# Altium PCB PCB1.PcbDoc
Units mm, origin at the board's own origin, x right, y up, seen from the top; angles counter-clockwise.
Board outline 146.69 x 93.34 mm, 2 copper layers (Top Layer, Bottom Layer); 89 components, 58 nets, 272 pads, 10 vias.
Unrouted connection lines stored in the file: 94.
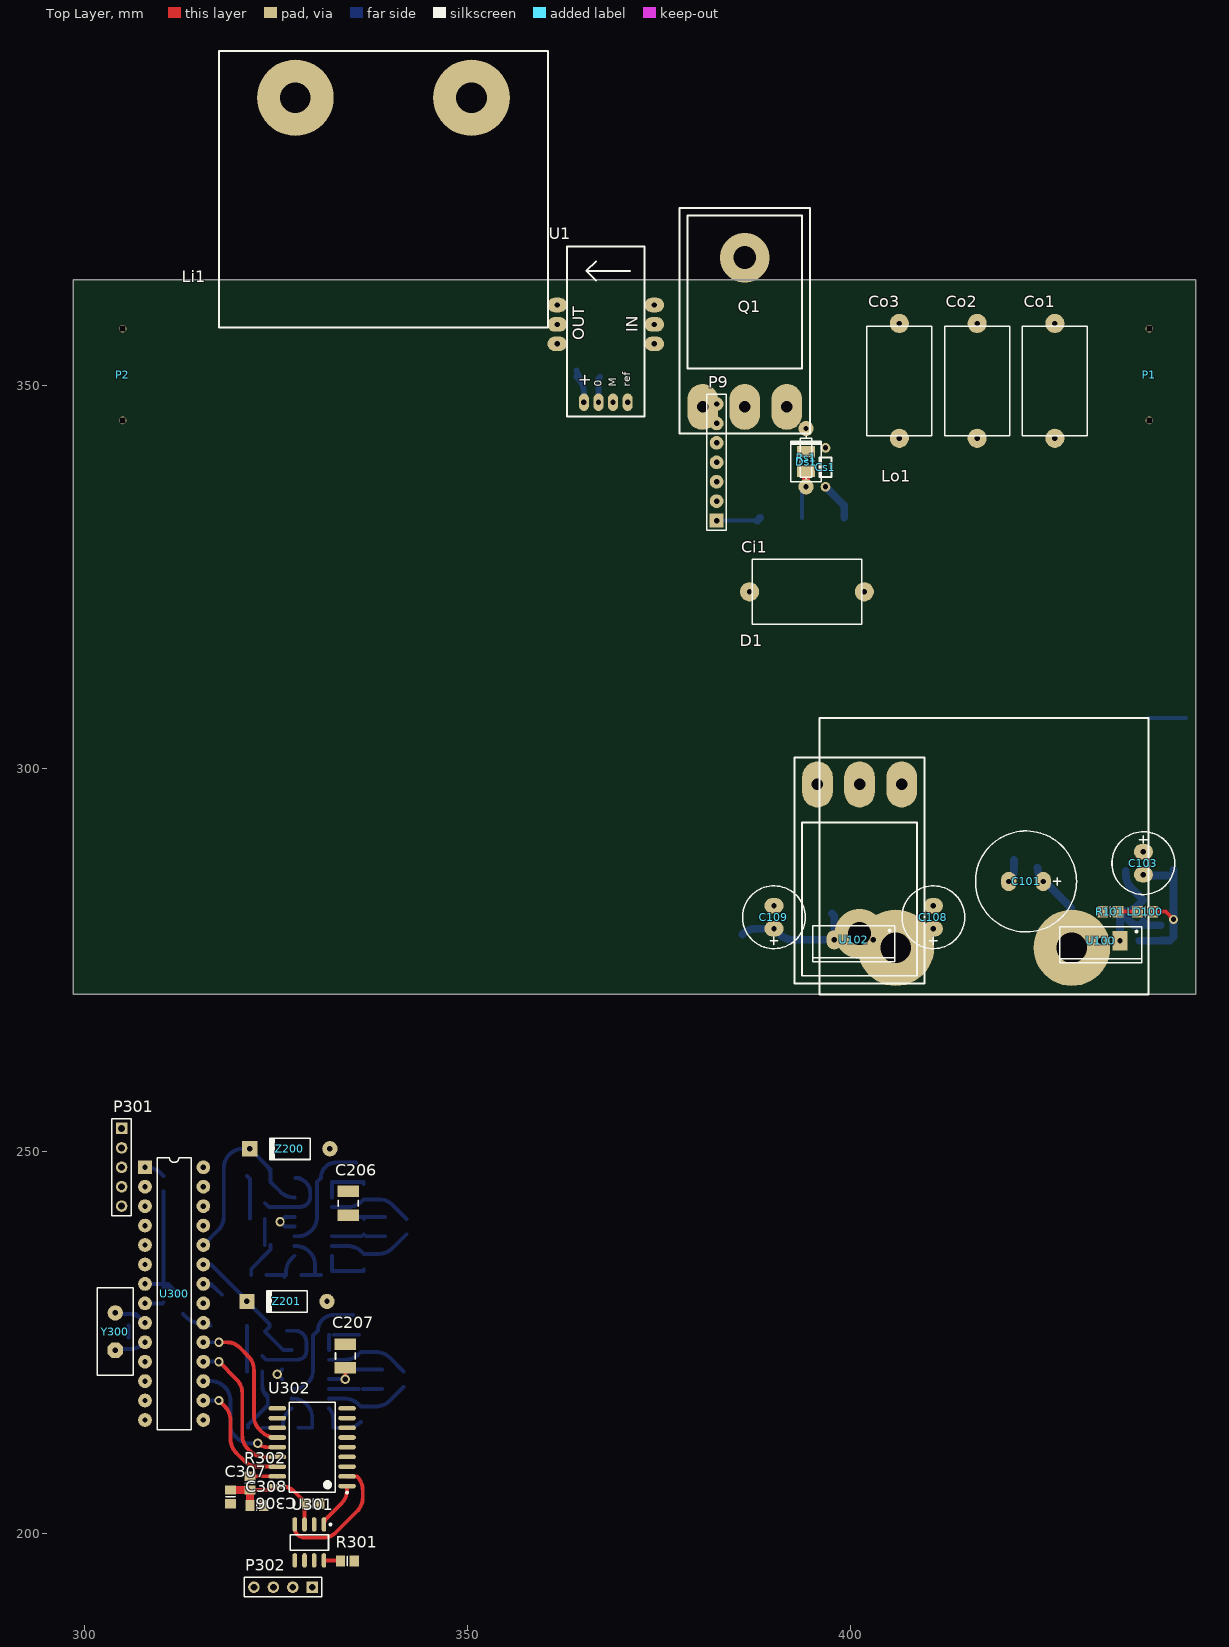
[diagram p0: Top Layer view]
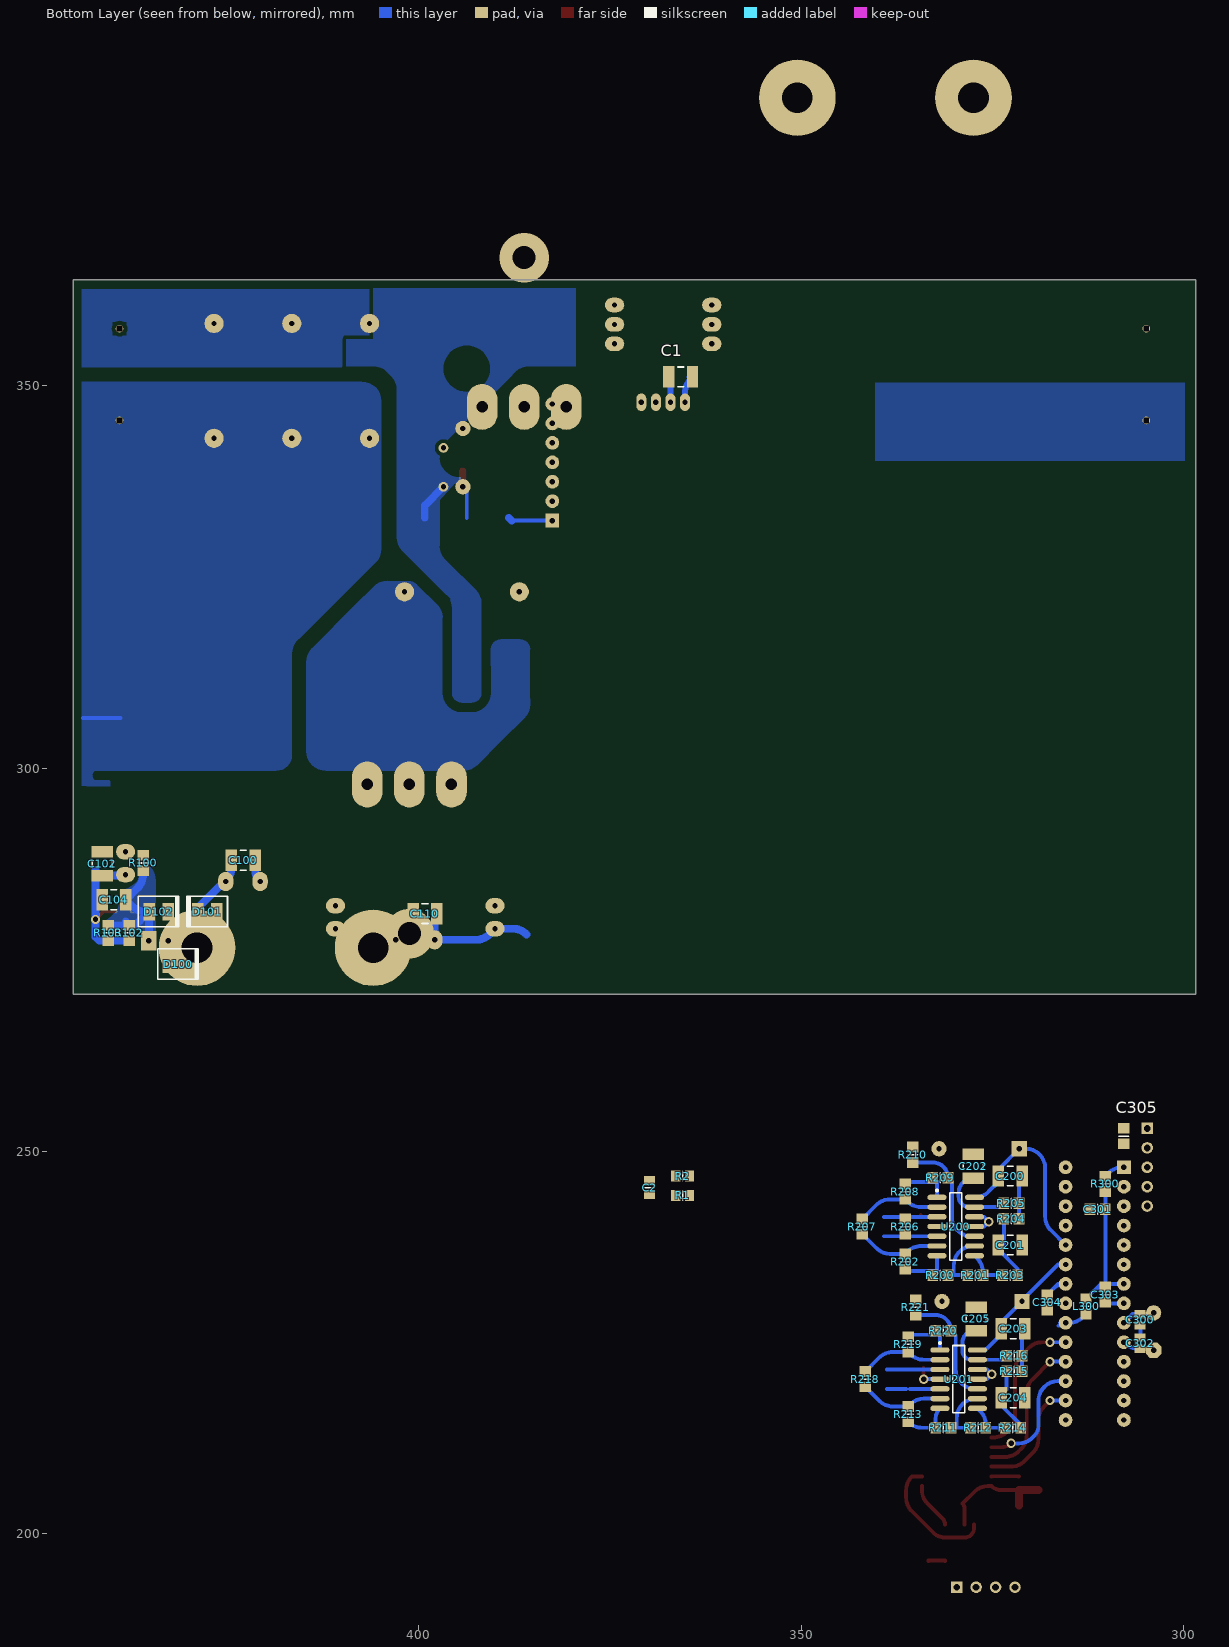
[diagram p1: Bottom Layer view, seen from below]

## Layer stack, top to bottom
Top Solder: solder mask 0.0102, Solder Resist, Dk 3.5
Top Layer: signal copper 0.0356
Dielectric1: dielectric 0.32, FR-4, Dk 4.8
Bottom Layer: signal copper 0.0356
Bottom Solder: solder mask 0.0102, Solder Resist, Dk 3.5

## Board outline
298.45,363.855 445.135,363.855 445.135,270.51 298.45,270.51

## Design rules (kind name [scope] priority, off if disabled: settings)
Clearance [All] p1: gap=0.508
PolygonConnect [All] p1: connectstyle=Direct reliefconductorwidth=0.254 reliefentries=4 polygonreliefangle="45 Angle" airgapwidth=0.254
RoomDefinition voltageSupplies [InComponentClass('voltageSupplies')] p1: confinementstyle=ConfineIn formatcopy=TRUE lockcomponents=FALSE outline 0,0 50.8,0 50.8,25.4 0,25.4
RoomDefinition uController [InComponentClass('uController')] p2: confinementstyle=ConfineIn formatcopy=TRUE lockcomponents=FALSE outline 0,0 50.8,0 50.8,25.4 0,25.4
RoomDefinition Signals [InComponentClass('Signals')] p3: confinementstyle=ConfineIn formatcopy=TRUE lockcomponents=FALSE outline 0,0 50.8,0 50.8,25.4 0,25.4
RoomDefinition cuk [InComponentClass('cuk')] p4: confinementstyle=ConfineIn formatcopy=TRUE lockcomponents=FALSE outline 0,0 50.8,0 50.8,25.4 0,25.4
RoutingVias [All] p1: holewidth=0.711 width=1.27 viastyle="Through Hole" minholewidth=0.711 minwidth=1.27 maxholewidth=0.711 maxwidth=1.27
SolderMaskExpansion [All] p1: expansion=0.102
Width [All] p1: maxlimit=2.54 minlimit=0.254 preferedwidth=0.508 minimp=50.000000 maximp=50.000000 favimp=50.000000
30 further rules are at their usual default settings.

## Classes and differential pairs
component class cuk: C1 C2 Ci1 Co1 Co2 Co3 Cs1 D1 Ds1 Li1 Lo1 P1 P2 P9 Q1 R1 R2 Rs1 U1
component class Signals: C200 C201 C202 C203 C204 C205 C206 C207 R200 R201 R202 R203 R204 R205 R206 R207 R208 R209 R210 R211 R212 R213 R214 R215 R216 R218 R219 R220 R221 U200 U201 Z200 Z201
component class uController: C300 C301 C302 C303 C304 C305 C306 C307 C308 L300 P301 P302 R300 R301 R302 U300 U301 U302 Y300
component class voltageSupplies: C100 C101 C102 C103 C104 C108 C109 C110 D100 D101 D102 LD100 R100 R101 R102 R103 U100 U102

## Components (designator, comment, footprint, x,y, rotation, side; value= is the part's Value field where it differs from the comment)
C1 "Cer" C1210_M 365.76,351.155 r0 bottom
C2 "Cap" 6-0805_N 369.824,245.237 r270 bottom
C100 "Cap" C1210_M 422.91,288.036 r0 bottom
C101 "Cap" CAPELTR-RAD6.6-DPP4.5 420.696,285.242 r0 top
C102 "Cap" C1210_M 441.325,287.555 r90 bottom
C103 "Cap" CAPELTR-RAD4.1-DPP3.0 438.277,286.131 r90 top
C104 "Cap" C1210_M 439.801,282.829 r180 bottom
C108 "Cap" CAPELTR-RAD4.1-DPP3.0 410.845,282.067 r270 top
C109 "Cap" CAPELTR-RAD4.1-DPP3.0 390.017,282.067 r270 top
C110 "Cap" C1210_M 399.161,281.051 r180 bottom
C200 "Cer" C1210_M 322.707,246.761 r0 bottom
C201 "Cer" C1210_M 322.707,237.744 r0 bottom
C202 "Cer" C1210_M 327.533,248.031 r270 bottom
C203 "Cer" C1210_M 322.326,226.822 r0 bottom
C204 "Cer" C1210_M 322.326,217.805 r0 bottom
C205 "Cer" C1210_M 327.152,228.092 r270 bottom
C206 "Cer" C1210_M 334.391,243.205 r270 top
C207 "Cer" C1210_M 334.035,223.241 r270 top
C300 "Cap" C0805 305.74,227.977 r90 bottom
C301 "Cap" 6-0805_M 311.277,242.443 r0 bottom
C302 "Cap" C0805 305.74,224.917 r270 bottom
C303 "Cap" 6-0805_M 310.261,231.267 r270 bottom
C304 "Cap" 6-0805_M 317.881,230.251 r90 bottom
C305 "Cap" 6-0805_M 307.848,251.984 r90 bottom
C306 "Cap" 6-0805_N 329.826,203.966 r180 top
C307 "Cap" 6-0805_N 319.024,204.84 r90 top
C308 "Cap" 6-0805_N 322.464,203.708 r180 top
Ci1 "Cap" CAP4U7 386.828,323.088 r0 top
Co1 "Cap" CAP4U7 426.72,358.14 r270 top
Co2 "Cap" cap4u7 416.56,358.14 r270 top
Co3 "Cap" cap4u7 406.4,358.14 r270 top
Cs1 "Cap" 100NF 396.748,336.804 r90 top
D1 "60APU06" TO-247AC_HORIZONTAL 401.2,278.42 r180 top locked
D100 "BYD77" SOD87 431.419,274.447 r180 bottom
D101 "Diode 1N4002" SOD87 427.609,281.305 r0 bottom
D102 "1N4002" SOD87 433.959,281.305 r180 bottom
Ds1 "BYD77" SOD87 394.208,340.106 r90 top
L300 "Ferrite Bead" 6-0805_M 312.801,229.743 r90 bottom
LD100 "RED" 6-0805_M 438.515,281.305 r0 top
Li1 "Inductor" ? 317.5,357.632 r0 top
Lo1 "Inductor" ? 438.94,306.578 r180 top
P1 "Battery Connection" "POWER CONNECTION" 439.067,351.472 r270 top
P2 "Panel Connection" "POWER CONNECTION" 304.927,351.472 r90 top
P9 "Driver (INEP)" HDR1X7 382.524,332.384 r90 top
P301 "UART" HDR1X5 304.8,252.984 r270 top
P302 "CAN" HDR1X4 329.692,193.04 r180 top
Q1 "IRFP260" TO-247AC_HORIZONTAL 386.2,366.74 r0 top locked
R1 "Res1" 6-0805_N 365.49,244.221 r180 bottom
R2 "Res1" 6-0805_N 365.49,246.761 r0 bottom
R100 "Res1" 6-0805_M 435.991,287.655 r270 bottom
R101 "Res1" 6-0805_M 433.975,281.305 r180 top
R102 "Res1" 6-0805_M 437.769,278.511 r90 bottom
R103 "Res1" 6-0805_M 440.563,278.511 r90 bottom
R200 "1%" 6-0805_M 331.819,233.807 r0 bottom
R201 "1%" 6-0805_M 327.263,233.807 r0 bottom
R202 "1%" 6-0805_M 336.423,235.585 r270 bottom
R203 "1%" 6-0805_M 322.723,233.807 r0 bottom
R204 "1%" 6-0805_M 322.545,241.173 r0 bottom
R205 "1%" 6-0805_M 322.545,243.205 r180 bottom
R206 "1%" 6-0805_M 336.423,240.157 r270 bottom
R207 "1%" 6-0805_M 342.011,240.157 r270 bottom
R208 "1%" 6-0805_M 336.423,244.713 r270 bottom
R209 "1%" 6-0805_M 331.819,246.507 r0 bottom
R210 "1%" 6-0805_M 335.407,249.539 r270 bottom
R211 "1%" 6-0805_M 331.438,213.868 r0 bottom
R212 "1%" 6-0805_M 326.882,213.868 r0 bottom
R213 "1%" 6-0805_M 336.042,215.646 r270 bottom
R214 "1%" 6-0805_M 322.342,213.868 r0 bottom
R215 "1%" 6-0805_M 322.164,221.234 r0 bottom
R216 "1%" 6-0805_M 322.164,223.266 r180 bottom
R218 "1%" 6-0805_M 341.63,220.218 r270 bottom
R219 "1%" 6-0805_M 336.042,224.774 r270 bottom
R220 "1%" 6-0805_M 331.438,226.568 r0 bottom
R221 "1%" 6-0805_M 335.026,229.6 r270 bottom
R300 "Res1" 6-0805_M 310.261,245.745 r270 bottom
R301 "Res1" 6-0805_N 334.282,196.462 r180 top
R302 "Res1" 6-0805_N 321.564,206.64 r90 top
Rs1 "1%" AXIAL-0.3 394.208,340.614 r270 top
U1 "LTSP 25-NP" "LTSP 25-NP" 374.396,355.473 r90 top
U100 "TL783" TO-220AB 432.689,277.495 r180 top
U102 "LM7805" TO-220AB 400.431,277.622 r180 top
U200 "LP324M" M14A_M 329.819,240.157 r180 bottom
U201 "LP324M" M14A_M 329.438,220.218 r180 bottom
U300 "ATmega328p" 28P3 311.658,231.394 r270 top
U301 "MCP2551-E/P" SOIC-SN8_L 329.318,198.886 r270 top
U302 "MCP2515-I/SO" SOIC-SO18_N 329.692,211.328 r180 top
Y300 "16MHz" HC-49U 303.962,226.441 r90 top
Z200 "5V1" DO-41 326.771,250.317 r180 top
Z201 "5V1" DO-41 326.39,230.378 r180 top

## Footprints (in the part's own frame and the unit in brackets; to place one, negate y for a bottom-side part, rotate by r counter-clockwise, add the part's x,y. Pads: shape width x height; smd on the part's side, far side on the other; paste and mask are expansions set on the pad)
6-0805_M [mm] "Chip Resistor, Body 2.0x1.2mm, IPC Low Density"
  rect 1.4x1.5 smd: 1(-1,0) 2(1,0)
  silkscreen extent 0,-0.65 0,0.65, body extent -1.07,-0.7 1.07,0.7, height 0.7
6-0805_N [mm] "Chip Resistor, Body 2.0x1.2mm, IPC Medium Density"
  rect 1.2x1.4 smd: 1(-0.9,0) 2(0.9,0)
  silkscreen extent 0,-0.6 0,0.6, body extent -1.07,-0.7 1.07,0.7, height 0.7
28P3 [mm] "DIP; 28 Leads; Row Spacing 7.62 mm; Pitch 2.54 mm"
  rect 1.8x1.8 hole 0.7: 1(-16.51,-3.81)
  round 1.8 hole 0.7: 2(-13.97,-3.81) 3(-11.43,-3.81) 4(-8.89,-3.81) 5(-6.35,-3.81) 6(-3.81,-3.81) 7(-1.27,-3.81) 8(1.27,-3.81) 9(3.81,-3.81) 10(6.35,-3.81) 11(8.89,-3.81) 12(11.43,-3.81) 13(13.97,-3.81) 14(16.51,-3.81) 15(16.51,3.81) 16(13.97,3.81) 17(11.43,3.81) 18(8.89,3.81) 19(6.35,3.81) 20(3.81,3.81) 21(1.27,3.81) 22(-1.27,3.81) 23(-3.81,3.81) 24(-6.35,3.81) 25(-8.89,3.81) 26(-11.43,3.81) 27(-13.97,3.81) 28(-16.51,3.81)
  silkscreen extent -17.78,-2.23 17.78,2.23
100NF [mm]
  round 1.27 hole 0.7: 1(0,0) 2(5.08,0)
  silkscreen extent 1.27,-0.76 3.81,0.76
AXIAL-0.3 [mm] "Axial Device, Thru-Hole; 2 Leads; 0.3 in Pin Spacing"
  round 2 hole 0.7: 1(-3.81,0) 2(3.81,0)
  silkscreen extent -2.77,-0.76 2.77,0.76
C0805 [mm] "Chip Capacitor, Body 2.0x1.3mm, IPC High Density"
  rect 1.1x1.4 smd: 1(-0.75,0) 2(0.75,0)
  body extent -1.1,-0.72 1.1,0.72, height 1.4
C1210_M [mm] "Chip Capacitor, Body 3.2x2.5mm, IPC Low Density"
  rect 1.5x2.8 smd: 1(-1.55,0) 2(1.55,0)
  silkscreen extent -0.4,-1.3 0.4,1.3, body extent -1.7,-1.35 1.7,1.35, height 1.5
CAP4U7 [mm]
  round 2.5 hole 0.7: 1(0,0) 2(15,0)
  silkscreen extent 0.35,-4.25 14.64,4.25
cap4u7 [mm]
  round 2.5 hole 0.7: 1(0,0) 2(15,0)
  silkscreen extent 0.35,-4.25 14.64,4.25
CAPELTR-RAD4.1-DPP3.0 [mm] "Capacitor Eletrolitico Radial 4.1mm com 3.0mm entre pinos"
  oval 2x2.5 hole 0.7: 1(0,0) 2(3,0)
  silkscreen extent -2.6,-4.1 5.6,4.1
CAPELTR-RAD6.6-DPP4.5 [mm] "Capacitor Eletrolitico Radial 6.6mm com 4.5mm entre pinos"
  oval 2x2.5 hole 0.7: 1(0,0) 2(4.5,0)
  silkscreen extent -4.35,-6.6 8.85,6.6
DO-41 [mm] "Diode, Axial; Body 5.2 x 2.7 mm (LxDia. max), Lead Dia. 0.86 mm (max)"
  round 2 hole 0.7: 1(-5.23,0)
  rect 2x2 hole 0.7: 2(5.23,0)
  silkscreen extent -2.65,-1.41 2.75,1.4
HC-49U [mm] "Quartz Crystal, Thru-Hole; 2 Leads; Body 11.35 x 4.65 x 13.46 mm (LxWxH max)"
  oct 2x2 hole 0.7: 1(-2.44,0)
  round 2 hole 0.7: 2(2.44,0)
  silkscreen extent -5.7,-2.35 5.7,2.35
HDR1X4 [mm] "Connector; Header; 4 Position"
  rect 1.5x1.5 hole 0.9: 1(0,0)
  round 1.5 hole 0.9: 2(2.54,0) 3(5.08,0) 4(7.62,0)
  silkscreen extent -1.27,-1.27 8.89,1.27
HDR1X5 [mm] "Connector; Header; 5 Position"
  rect 1.5x1.5 hole 0.9: 1(0,0)
  round 1.5 hole 0.9: 2(2.54,0) 3(5.08,0) 4(7.62,0) 5(10.16,0)
  silkscreen extent -1.27,-1.27 11.43,1.27
HDR1X7 [mm] "Connector; Header; 7 Position"
  rect 1.8x1.8 hole 0.7: 1(0,0)
  round 1.8 hole 0.7: 2(2.54,0) 3(5.08,0) 4(7.62,0) 5(10.16,0) 6(12.7,0) 7(15.24,0)
  silkscreen extent -1.27,-1.27 16.51,1.27
"LTSP 25-NP" [mm] "Current Transducer (25 A)"
  oval 1.9x2.54 hole 0.7 unplated: 1(0,0) 2(2.54,0) 3(5.08,0) 4(5.08,12.7) 5(2.54,12.7) 6(0,12.7)
  oval 2.3x1.3 hole 0.7 unplated: 7(-7.62,9.21) 8(-7.62,7.305) 9(-7.62,5.4) 10(-7.62,3.495)
  silkscreen extent -9.46,1.27 12.74,11.43
M14A_M [mm] "SOIC, 14-Leads, Body 8.6x3.9mm, Pitch 1.27mm, IPC Low Density"
  oval 2.5x0.7 smd: 1(-2.45,3.81) 2(-2.45,2.54) 3(-2.45,1.27) 4(-2.45,0) 5(-2.45,-1.27) 6(-2.45,-2.54) 7(-2.45,-3.81) 8(2.45,-3.81) 9(2.45,-2.54) 10(2.45,-1.27) 11(2.45,0) 12(2.45,1.27) 13(2.45,2.54) 14(2.45,3.81)
  silkscreen extent -2.58,-4.4 0.8,4.83, body extent -2,-4.38 2,4.38, height 1.75
"POWER CONNECTION" [mm]
  round 1 hole 0.7 square: 1(-6,0) 2(6,0)
SOD87 [mm]
  rect 1.5x2.3 smd: A(-1.253,0) K(1.253,0)
  silkscreen extent -2.65,-2.01 2.65,2.01
SOIC-SN8_L [mm] "SOIC, 8-Leads, Body 4.9x3.8mm, Pitch 1.27mm, IPC High Density"
  oval 1.9x0.6 smd: 1(-2.35,1.905) 2(-2.35,0.635) 3(-2.35,-0.635) 4(-2.35,-1.905) 5(2.35,-1.905) 6(2.35,-0.635) 7(2.35,0.635) 8(2.35,1.905)
  silkscreen extent -2.47,-2.5 1,2.88, body extent -2,-2.5 2,2.5, height 1.75
SOIC-SO18_N [mm] "SOIC, 18-Leads, Body 11.5x7.5mm, Pitch 1.27mm, IPC Medium Density"
  oval 2.3x0.6 smd: 1(-4.55,5.08) 2(-4.55,3.81) 3(-4.55,2.54) 4(-4.55,1.27) 5(-4.55,0) 6(-4.55,-1.27) 7(-4.55,-2.54) 8(-4.55,-3.81) 9(-4.55,-5.08) 10(4.55,-5.08) 11(4.55,-3.81) 12(4.55,-2.54) 13(4.55,-1.27) 14(4.55,0) 15(4.55,1.27) 16(4.55,2.54) 17(4.55,3.81) 18(4.55,5.08)
  silkscreen extent -4.67,-5.9 3,6.05, body extent -3.8,-5.95 3.8,5.95, height 2.65
TO-220AB [mm] "TO, Thru-Hole, Vertical, Heatsink Mounted; 3 In-Line Leads; Pitch 2.54 mm"
  rect 2x2.5 hole 0.7: 1(-2.54,0)
  oval 2x2.5 hole 0.7: 2(0,0) 3(2.54,0)
  silkscreen extent -5.35,-1.85 5.35,2.85, body extent -5.4,-1.9 5.4,2.9, height 19.3
TO-247AC_HORIZONTAL [mm]
  oval 4x6 hole 1.5: 1(-5.5,-19.5) 2(0,-19.5) 3(5.5,-19.5)
  silkscreen extent -8.5,-23 8.5,6.5, body extent -7.75,-19.8 7.75,5.6, height 5
? [mm]
  round 10 hole 4: 1(10,30) 2(33,30)
  silkscreen extent 0,0 43,36.1

## Part data
C1 C200 C201 C202 C203 C204 C205 C206 C207: library part Cap, "Capacitor"
C2 C100 C101 C102 C103 C104 C108 C109 C110 C301 C303 C304 C305 C306 C307 C308 Ci1 Co1 Co2 Co3 Cs1: "Capacitor"
C300 C302: library part "Cap Semi", "Capacitor (Semiconductor SIM Model)"
D100 D102 Ds1: library part "Diode 1N4002", "1 Amp General Purpose Rectifier"
D101: "1 Amp General Purpose Rectifier"
L300: library part Inductor, "Inductor"
LD100: library part LED, "Diodo Emissor de Luz"
P1 P2: library part "Header 2", "Header, 2-Pin"
P9: library part "Header 7", "Header, 7-Pin"
P301: library part "Header 5", "Header, 5-Pin"
P302: library part "Header 4", "Header, 4-Pin"
Q1: "HEXFET Power MOSFET"
R1 R2 R100 R101 R102 R103 R300 R301 R302: "Resistor"
R200 R201 R202 R203 R204 R205 R206 R207 R208 R209 R210 R211 R212 R213 R214 R215 R216 R218 R219 R220 R221 Rs1: library part Res1, "Resistor"
U1: "Current Transducer LTSP (25 A)"
U100: library part L7805ACV, "Precision 1A Regulator"
U102: library part µA7805CKC, "Positive-Voltage Regulator"
U200 U201: "Micropower Quad Operational Amplifier"
U300: library part ATmega8-16PI, "8-Bit AVR Microcontroller with 8K Bytes of In-System Programmable Flash Memory"
U301: "High-Speed CAN Transceiver, 8-Pin PDIP, Extended Temperature"
U302: "Stand-Alone CAN Controller With SPI Interface, 18-Pin SOIC, Industrial Temperature"
Y300: library part ECS-10-13-1, "Crystal Oscillator"
Z200 Z201: library part "D Zener", "Zener Diode"

## Via types
v1: diameter 1.2, hole 0.7, Top Layer to Bottom Layer, 8 vias
v2: diameter 6.5, hole 3, Top Layer to Bottom Layer, 2 vias

## Nets (pads, with @x,y where several pads share a name; then routed paths per layer and width w, separated by ;. In a path a pad name is that pad's centre, name@x,y a point inside that pad or via, vN(x,y) a via of type N, cw(c..) or ccw(c..) an arc to the next point about the centre after c; other vN are vias at no path point)
+5V: C1.1 C109.2 C110.2 C301.1 C303.1 C306.2 C307.2 C308.2 L300.2 R300.2 R302.1 U1.7 U102.3 U300.7 U301.3 U302.18 | length 58.3
  Top Layer w0.508: R302.1 323.916,205.74 ccw(c323.916,207.474) U302.18 325.592,206.248 cw(c325.592,203.708) 327.388,205.504 C306.2 ; C306.2@328.676,204.216 C306.2 ; U301.3 328.683,203.379 cw(c329.513,203.379) C306.2
  Top Layer w1.016: C307.2 R302.1 C308.2
  Bottom Layer w0.508: U300.7 C303.1@310.261,232.664 ; R300.2 C303.1@310.261,232.664 ; L300.2@312.181,231.363 310.88,232.664 C303.1@310.261,232.664 ; C303.1 cw(c310.261,229.814) 311.995,231.549 ccw(c310.261,229.814) C303.1 ; C303.1 C303.1@310.261,232.664
  Bottom Layer w0.762: C1.1@364.21,352.018 C1.1@364.591,351.155 ; U1.7 365.186,349.127 ccw(c362.646,349.127) 364.442,350.923 C1.1 ; C1.1 ccw(c364.21,351.181) 364.236,351.181 cw(c364.21,351.181) C1.1 ; C1.1 ccw(c364.147,351.218) 364.236,351.218 cw(c364.147,351.218) C1.1
  Bottom Layer w1.016: 385.892,278.323 cw(c387.688,276.527) 387.688,279.067 C109.2 390.718,278.366 ccw(c392.514,280.162) 392.514,277.622 U102.3 397.891,280.771 C110.2
+5V_ADC: C206.2 C207.2 C304.1 L300.1 U200.4 U201.4 U300.20 | length 9.5
  Top Layer w0.508: v1(334.01,220.218) C207.2
  Bottom Layer w0.508: L300.1 313.216,228.328 ccw(c315.012,230.124) 315.012,227.584 U300.20 ; U300.20@315.468,227.646 U300.20 ; U300.20@316.214,227.584 U300.20 ; U201.4 v1(334.01,220.218) ; U300.20 ccw(c316.388,228.504) 316.388,227.203 cw(c316.388,228.504) U300.20
+12V: C102.2 C103.2 C108.2 D100.A D102.K P9.5 R100.1 R101.2 U100.2 U102.1
+VBAT: Co1.1 Co2.1 Co3.1 Cs1.1 D1.2 D101.A P9.2 Q1.3 U1.1 U1.2 U1.3 U201.5 | length 9
  Bottom Layer w0.508: U201.5 335.772,218.948
  Bottom Layer w1: Cs1.1@396.73,336.822 Cs1.1 399.2,334.352 399.2,332.74
+VPANEL: Ci1.1 Ds1.A P2.1 Q1.2 R1.1 Rs1.2 | length 6.6
  Top Layer w1: Rs1.2@394.208,336.296 Rs1.2 Ds1.A
  Bottom Layer w0.508: 393.7,332.74 Rs1.2@393.7,336.804
CAN_CS: U300.16 U302.16 | length 16.1
  Top Layer w0.508: U300.16 U300.16@315.94,217.424 ; v1(317.5,217.424) 318.28,216.644 cw(c316.484,214.848) 319.024,214.848 319.024,212.38 ccw(c321.564,212.38) 319.768,210.584 320.82,209.532 ccw(c322.616,211.328) 322.616,208.788 U302.16
  Bottom Layer w0.508: U300.16 v1(317.5,217.424)
CAN_INT: U300.4 U302.12
CAN_SCK: U300.19 U302.13 | length 19.2
  Top Layer w0.508: v1(317.5,225.044) 318.516,225.044 cw(c318.516,222.591) 320.25,224.326 321.328,223.248 cw(c319.532,221.452) 322.072,221.452 322.072,215.428 ccw(c324.612,215.428) 322.816,213.632 323.106,213.342 ccw(c324.902,215.138) 324.902,212.598 U302.13
  Bottom Layer w0.508: U300.19 v1(317.5,225.044)
CAN_SI: U300.17 U302.14 | length 17.1
  Top Layer w0.508: U302.14 323.806,211.328 ; 323.806,211.328 cw(c323.806,213.062) v1(322.58,211.836) ccw(c323.806,213.062) 323.806,211.328
  Bottom Layer w0.508: U300.17 316.448,219.964 cw(c316.448,217.424) 318.244,219.22 318.28,219.184 cw(c316.484,217.388) 319.024,217.388 319.024,214.078 ccw(c320.758,214.078) 319.532,212.852 319.804,212.58 ccw(c321.6,214.376) 321.6,211.836 v1(322.58,211.836)
CAN_SO: U300.18 U302.15 | length 19
  Top Layer w0.508: v1(317.5,222.504) 319.804,220.2 cw(c318.008,218.404) 320.548,218.404 320.548,212.888 ccw(c323.088,212.888) 321.292,211.092 321.582,210.802 ccw(c323.378,212.598) 323.378,210.058 U302.15
  Bottom Layer w0.508: U300.18 v1(317.5,222.504)
CANH: P302.1 U301.7
CANL: P302.2 U301.6
GATE: P9.1 Q1.1 | length 5.8
  Bottom Layer w0.508: P9.1 387.844,332.384
  Bottom Layer w1: 387.844,332.384 388.2,332.74
GND: C1.2 C100.1 C101.1 C102.1 C103.1 C104.1 C108.1 C109.1 C110.1 C201.1 C202.1 C204.1 C205.1 C206.1 C207.1 C300.1 C301.2 C302.1 C303.2 C304.2 C306.1 C307.1 C308.1 Co1.2 Co2.2 Co3.2 LD100.2 Lo1.1 P1.2 P9.4 P9.7 P301.2 P302.3 P302.4 R102.1 R103.1 R206.2 R210.1 R221.1 R301.1 U1.8 U102.2 U200.5 U200.11 U201.11 U300.8 U300.22 U301.2 U302.9 Z200.1 Z201.1 | length 56.6
  Top Layer w0.508: LD100.2 441.198,281.305 v1(442.214,280.289)
  Bottom Layer w0.508: C302.1@305.689,225.667 C300.1@305.689,227.227 ; U300.8 310.118,230.124 C303.2 ; C304.2 317.175,231.957 ; U201.11@325.755,220.218 v1(325.12,220.853) 325.755,221.488 ; U200.11 326.136,240.157 v1(325.501,240.792) 326.136,241.427 327.369,241.427 ; U200.5 336.153,238.887 R206.2 336.693,238.887 339.217,238.887 ; 438.94,306.578 443.865,306.578 ; 317.175,231.957 ccw(c315.468,230.25) U300.22 316.468,232.664 317.175,231.957
  Bottom Layer w0.762: U1.8 367.091,350.936 C1.2
  Bottom Layer w1.016: U102.2 400.431,280.771 C110.1 ; C101.1 ccw(c419.093,286.845) 421.36,286.845 C100.1 ; R102.1@437.785,277.495 440.579,277.495 R103.1 441.722,277.511 442.214,278.003 v1(442.214,280.289) 442.214,286.766 ; C103.1 438.403,286.005 C102.1
NetC2_1: C2.1 R1.2 R2.1 U201.3 | length 5.4
  Bottom Layer w0.508: 333.158,221.488 336.042,221.488 ; 336.312,221.488 338.836,221.488
NetC2_2: C2.2 Li1.1 P2.2 R2.2
NetC100_2: C100.2 C101.2 D100.K D101.K U100.3 | length 22.1
  Bottom Layer w1.016: D101.K@428.529,282.109 cw(c427.725,281.305) D101.K ; U100.3 430.149,280.018 D101.K ; 430.149,278.966 ccw(c427.609,278.966) 429.405,280.762 D101.K ; D100.K U100.3@430.166,277.478 ; C101.2 cw(c426.973,287.019) 424.46,287.019 ccw(c426.973,287.019) C101.2 ; C101.2 425.396,285.242 428.862,281.776 D101.K ; D101.K@428.671,281.767 cw(c428.208,281.305) D101.K ; D101.K@428.671,281.767 cw(c428.208,281.305) D101.K ; D101.K@428.671,281.767 cw(c428.208,281.305) D101.K
NetC104_2: C104.2 D102.A R100.2 R102.2 R103.2 U100.1 | length 22
  Bottom Layer w1.016: U100.1 435.229,281.288 437.006,279.511 R102.2 ; R100.2 435.991,286.141 ccw(c438.531,286.141) 436.735,284.345 C104.2 437.471,282.049 cw(c435.675,283.845) 435.675,281.305 D102.A 436.467,280.05 ccw(c437.769,281.353) R102.2 ; R102.2@438.251,279.993 R102.2 ; R103.2 R102.2
NetC200_1: C200.1 R204.1 R205.2 | length 5.7
  Bottom Layer w0.508: C200.1 321.545,246.373 R205.2 R204.1
NetC200_2: C200.2 U200.13 U200.14 U300.24 Z200.2 | length 28.4
  Bottom Layer w0.5: U300.24 317.391,239.667
  Bottom Layer w0.508: 317.391,239.667 ccw(c315.595,241.463) 318.135,241.463 318.135,247.777 cw(c320.675,247.777) 318.317,248.721 cw(c320.675,247.777) 319.731,250.135 cw(c320.675,247.777) 320.675,250.317 Z200.2 324.257,247.601 C200.2 ; U200.14 327.315,243.967 cw(c327.315,246.507) 325.519,244.711 324.257,245.973 C200.2 ; C200.2 ccw(c322.229,246.761) 323.663,248.195 cw(c322.229,246.761) C200.2
NetC201_2: C201.2 R203.1 R204.2 | length 8.4
  Bottom Layer w0.508: R203.1 321.723,234.601 324.257,237.135 C201.2 ; 323.495,237.744 R204.2@323.495,241.123
NetC202_2: C202.2 R205.1 U200.12 | length 11.6
  Bottom Layer w0.508: R205.1 324.053,242.697 327.369,242.697 ; C202.2@328.067,246.481 C202.2 cw(c327.533,244.576) 329.438,244.576 329.438,244.094 cw(c328.041,244.094) 328.041,242.697 ; 327.369,242.697 328.041,242.697 ; 327.369,242.697 328.041,242.697
NetC203_1: C203.1 R215.1 R216.2 | length 6
  Bottom Layer w0.508: R215.1 R216.2 R216.2@321.183,223.247 ; C203.1@321.183,227.203 321.183,226.822 R216.2@321.183,223.266 ; R216.2@321.183,223.247 R216.2@321.183,223.266 ; R216.2@321.183,223.247 R216.2@321.183,223.266
NetC203_2: C203.2 U201.13 U201.14 U300.23 Z201.2 | length 17.7
  Bottom Layer w0.508: U300.23 316.456,235.204 321.16,230.5 Z201.2 324.104,227.434 324.104,227.05 323.495,226.441 325.908,224.028 U201.14
NetC204_2: C204.2 R214.1 R215.2 | length 12.2
  Bottom Layer w0.508: R214.1@321.291,213.868 321.291,214.216 323.876,216.801 C204.2 ; R215.2 323.164,218.833 C204.2@323.876,218.121 ; C204.2 cw(c325.595,219.524) 323.164,219.524 ccw(c325.595,219.524) C204.2
NetC205_2: C205.2 R216.1 U201.12 | length 11.2
  Bottom Layer w0.508: R216.1 323.672,222.758 326.988,222.758 327.787,222.758 ccw(c327.787,223.901) 328.93,223.901 328.93,225.044 ccw(c327.432,225.044) 327.432,226.542 C205.2@326.39,226.542
NetC300_2: C300.2 U300.9 Y300.2 | length 6.4
  Bottom Layer w0.508: Y300.2@304.419,228.727 306.705,228.727 U300.9 307.388,228.044 ccw(c305.74,226.397) C300.2
NetC302_2: C302.2 U300.10 Y300.1 | length 3.9
  Bottom Layer w0.508: Y300.1@304.419,224.421 304.419,224.167 C302.2 305.919,224.167 ccw(c305.919,226.707) 307.715,224.911 U300.10
NetC305_1: C305.1 R300.1 U300.1 | length 2.8
  Bottom Layer w0.508: U300.1 308.05,247.904 cw(c308.05,245.364) 309.846,247.16 R300.1
NetCi1_2: Ci1.2 D1.1 D1.3 Lo1.2
NetCs1_2: Cs1.2 Ds1.K Rs1.1
NetLD100_1: LD100.1 R101.1 | length 2.5
  Top Layer w0.508: R101.1 LD100.1
NetLi1_2: Li1.2 U1.4 U1.5 U1.6
NetP9_6: P9.6 U300.5
NetR200_1: R200.1 R201.2 U200.9 | length 8
  Bottom Layer w0.508: U200.9 327.533,237.617 cw(c327.533,235.077) 330.073,235.077 330.073,233.807 ; R201.2 330.073,233.807 ; R200.1 330.073,233.807
NetR200_2: R200.2 R202.2 U200.7 | length 6.5
  Bottom Layer w0.508: U200.7 332.269,234.357 332.819,234.357 R202.2@336.195,234.357 ; R202.2@336.423,234.357 R202.2@336.195,234.357 ; R202.2 R202.2@336.195,234.357
NetR201_1: R201.1 R203.2 U200.8 | length 5.7
  Bottom Layer w0.508: R203.2 R201.1 ; R201.1@326.041,233.585 R201.1 ; U200.8 327.007,235.985 ccw(c328.803,234.189) 326.263,234.189 R201.1
NetR202_1: R202.1 R207.2 U200.6 | length 11
  Bottom Layer w0.508: U200.6 334.339,237.617 cw(c334.339,235.077) 336.135,236.873 R202.1 338.387,236.585 ccw(c338.387,239.125) 340.18,237.326 ccw(c338.387,239.125) 340.183,237.329 R207.2
NetR206_1: R206.1 U1.9 U200.3 | length 6.1
  Bottom Layer w0.508: 333.539,241.427 336.423,241.427 R206.1@336.693,241.427 ; R206.1 R206.1@336.693,241.427 ; 339.217,241.427 R206.1@336.693,241.427
NetR207_1: R207.1 R208.2 U200.2 | length 11
  Bottom Layer w0.508: U200.2 334.355,242.697 ccw(c334.355,245.237) 336.151,243.441 R208.2 338.403,243.713 cw(c338.403,241.173) 340.199,242.969 R207.1
NetR208_1: R208.1 R209.2 U200.1 | length 6.5
  Bottom Layer w0.508: U200.1 332.269,245.957 332.819,245.957 R208.1@336.179,245.957 ; R208.1 R208.1@336.179,245.957 ; R208.1@336.423,245.957 R208.1@336.179,245.957
NetR209_1: R209.1 R210.2 U200.10 | length 18.6
  Bottom Layer w0.508: U200.10 327.787,238.887 ccw(c327.787,241.427) 330.327,241.427 330.327,246.015 R209.1 ; R210.2 332.851,248.539 ; R209.1 cw(c332.851,246.507) 332.851,248.539 ; R209.1 cw(c332.851,246.507) 332.851,248.539
NetR211_1: R211.1 R212.2 U201.9 | length 7.2
  Bottom Layer w0.508: U201.9 327.152,217.678 cw(c327.152,215.138) 329.692,215.138 329.692,213.868 R212.2
NetR211_2: R211.2 R213.2 U201.7 | length 6.5
  Bottom Layer w0.508: U201.7 cw(c330.56,215.08) 332.438,215.08 R211.2 334.212,213.868 ccw(c334.212,216.408) 336.008,214.612 R213.2
NetR212_1: R212.1 R214.2 U201.8 | length 5.6
  Bottom Layer w0.508: R214.2@323.164,213.868 R214.2 R212.1 325.882,214.25 cw(c328.422,214.25) 326.626,216.046 U201.8
NetR213_1: R213.1 R218.2 U201.6 | length 11
  Bottom Layer w0.508: U201.6 333.958,217.678 cw(c333.958,215.138) 335.754,216.934 R213.1 338.006,216.646 ccw(c338.006,219.186) 338.011,216.646 ccw(c338.006,219.186) 339.799,217.387 ccw(c338.006,219.186) 339.802,217.39 R218.2
NetR218_1: R218.1 R219.2 U201.2 | length 11
  Bottom Layer w0.508: U201.2 333.974,222.758 ccw(c333.974,225.298) 335.77,223.502 R219.2 338.022,223.774 cw(c338.022,221.234) 339.818,223.03 R218.1
NetR219_1: R219.1 R220.2 U201.1 | length 5.4
  Bottom Layer w0.508: U201.1 R220.2@331.888,226.018 ; R220.2@332.438,226.018 R219.1@335.798,226.018
NetR220_1: R220.1 R221.2 U201.10 | length 15.4
  Bottom Layer w0.508: U201.10 327.279,218.948 ccw(c327.279,221.488) 329.819,221.488 329.819,225.949 R220.1 cw(c332.47,226.568) 332.47,228.6 R221.2
NetR301_2: R301.2 U301.8 | length 2.3
  Top Layer w0.508: U301.8@331.223,196.462 U301.8 333.382,196.536 R301.2
NetR302_2: R302.2 U302.17 | length 3.8
  Top Layer w0.508: R302.2 ccw(c321.617,207.593) 321.617,207.518 cw(c321.617,207.593) R302.2 ; R302.2 U302.17@325.089,207.54 ; U302.17@325.089,207.54 cw(c325.089,207.465) U302.17 ccw(c325.089,207.465) U302.17@325.089,207.54
OSC1: U302.8
OSC2: U302.7
RTS: C305.2 P301.1
RXCAN: U301.4 U302.2 | length 16.9
  Top Layer w0.508: U301.4 327.413,200.787 ccw(c328.676,200.787) 328.676,199.524 331.224,199.524 ccw(c331.224,201.668) 332.74,200.152 335.552,202.964 ccw(c333.756,204.76) 336.296,204.76 336.296,205.704 ccw(c333.756,205.704) 335.552,207.5 335.534,207.518 U302.2
TXCAN: U301.1 U302.1 | length 6.1
  Top Layer w0.508: U301.1 cw(c332.302,201.236) 331.539,201.999 333.498,203.958 ccw(c331.702,205.754) 334.242,205.754 U302.1
USART_RX: P301.4 U300.2
USART_TX: P301.5 U300.3
pads on no net: P1.1 P9.3 P301.3 U1.10 U300.6 U300.11 U300.12 U300.13 U300.14 U300.15 U300.21 U300.25 U300.26 U300.27 U300.28 U301.5 U302.3 U302.4 U302.5 U302.6 U302.10 U302.11
copper on no net: | length 2.5
  Bottom Layer w0.508: 336.312,218.948 338.836,218.948
  other v2: 401.2,278.42 386.2,366.74

## Polygon pours and split planes (outlines as drawn)
no net on Bottom Layer "Top Layer--VBAT" (solid, pour order 1038): 394.97,337.566 397.764,337.566 397.764,335.026 397.51,334.772
no net on Bottom Layer "Top Layer--VBAT" (solid, pour order 1046): 397.256,337.591 397.256,340.832 ccw(c394.716,340.832) 396.512,342.628 388.112,351.028 387.332,351.808 ccw(c385.536,350.012) 385.536,352.552 379.476,352.552 379.476,362.712 405.892,362.712 405.892,352.552 405.892,356.108 409.448,356.108 409.448,352.552 407.924,352.552 405.928,352.552 ccw(c405.928,350.012) 404.132,351.808 403.86,351.536 403.588,351.264 ccw(c405.384,349.468) 402.844,349.468 402.844,344.932 402.844,330.708 402.844,330.236 cw(c400.304,330.236) 402.1,328.44 398.78,325.12
no net on Bottom Layer "Top Layer--VBAT" (solid, pour order 1045): 443.992,350.52 407.416,350.52 ccw(c407.416,347.98) 404.876,347.98 404.876,330.2 404.876,328.712 ccw(c407.416,328.712) 405.62,326.916 415.544,316.992 415.816,316.72 cw(c414.02,314.924) 416.56,314.924 416.56,301.752 ccw(c418.592,301.752) 418.592,299.72 443.992,299.72 443.992,310.388
no net on Bottom Layer "Bottom Layer-+VPANEL" (solid, pour order 1044): 397.256,335.788 397.256,337.591 401.955,337.591 401.955,329.347 cw(c399.415,329.347) 401.211,327.551 396.349,322.689 396.875,323.215 393.7,320.04 396.349,322.689 ccw(c398.145,320.893) 395.605,320.893 395.605,309.88 cw(c394.335,309.88) 394.335,308.61 393.065,308.61 cw(c393.065,309.88) 391.795,309.88 391.795,321.528 cw(c394.335,321.528) 392.539,323.324 396.24,327.025 396.512,327.297 ccw(c394.716,329.093) 397.256,329.093
+VBAT on Bottom Layer "Top Layer--VBAT" (solid, pour order 1042): 443.992,352.425 378.968,352.425 378.968,362.585 443.992,362.585
NetCi1_2 on Bottom Layer "Bottom Layer-+VPANEL" (solid, pour order 1040): 414.655,302.26 414.655,313.908 ccw(c412.115,313.908) 413.911,315.704 401.955,327.66 408.305,321.31 405.874,323.741 ccw(c404.078,321.945) 404.078,324.485 401.32,324.485 ccw(c401.32,322.952) 400.236,324.036 397.51,321.31 ccw(c399.043,319.777) 396.875,319.777 396.875,310.515 396.875,309.88 cw(c394.335,309.88) 394.335,307.34 393.7,307.34 393.065,307.34 cw(c393.065,309.88) 390.525,309.88 390.525,311.15 390.525,315.595 ccw(c389.255,315.595) 389.255,316.865 386.715,316.865 ccw(c386.715,315.595) 385.445,315.595 385.445,309.88 385.445,308.392 ccw(c387.985,308.392) 386.189,306.596 389.255,303.53 392.321,300.464 ccw(c394.117,302.26) 394.117,299.72 411.48,299.72 412.115,299.72 ccw(c412.115,302.26) 414.655,302.26 414.655,305.435
no net on Bottom Layer "Top Layer--VBAT" (solid, pour order 1037): 440.309,298.45 442.087,298.45 ccw(c442.087,298.958) 442.595,298.958 442.595,299.212 ccw(c442.087,299.212) 442.087,299.72 440.309,299.72 440.309,300.482 cw(c440.563,300.482) 440.563,300.736 443.357,300.736 443.357,297.688 440.309,297.688
no net on Bottom Layer "Top Layer--VBAT" (solid, pour order 1039): 394.462,338.074 394.716,338.074 ccw(c394.716,340.614) 397.256,340.614 397.256,341.884 cw(c397.256,340.868) 398.272,340.868 398.272,337.185 394.716,337.185 cw(c394.716,337.566) 394.335,337.566
NetC104_2 on Bottom Layer "Top Layer--VBAT" (solid, pour order 1043): 435.229,287.274 435.084,287.129 ccw(c436.88,285.333) 434.34,285.333 434.34,278.003 436.118,278.003 cw(c437.007,278.003) 437.007,278.892 441.325,278.892 441.325,280.035 441.325,280.162 cw(c441.325,281.695) 440.241,280.611 439.039,281.813 439.801,281.051 439.783,281.069 cw(c441.579,282.865) 439.039,282.865 439.039,283.337 439.039,284.226 438.785,284.226 cw(c438.785,286.258) 436.753,286.258 436.753,286.893
no net on Bottom Layer "Top Layer--VBAT" (solid, pour order 1047): 443.357,300.736 ccw(c443.643,301.022) 443.643,300.618 443.992,300.618 443.992,297.715 443.422,297.715 ccw(c443.422,297.623) 443.357,297.688
+VPANEL on Bottom Layer "Top Layer--VBAT" (solid, pour order 1041): 340.36,340.228 299.923,340.228 299.923,350.388 340.36,350.388

## Dimensions
298.196,270.51 to 445.135,270.51 on Mechanical 1
298.45,363.855 to 298.45,270.51 on Mechanical 1

## Text inside footprints (layer, text, board x,y; h text height)
U1: Top Overlay "IN" at 372.237,356.997 h1.52 r90; Top Overlay "OUT" at 365.252,355.981 h1.52 r90; Top Overlay "+" at 366.014,349.885 h1.52 r90; Top Overlay "0" at 367.538,349.885 h1 r90; Top Overlay "M" at 369.443,349.885 h1 r90; Top Overlay "ref" at 371.221,349.885 h1 r90